# EAGLE board Adding Components (1) (EAGLE 7.6.0)

Size 56.82 x 53.33 mm. Coordinates in mm from the lower left corner, seen from the top.
Outline: 0,0 56.82,0 56.82,53.33 0,53.33 0,0
Copper layers (1*16): Top 0.035mm / dielectric 1.5mm / Bottom 0.035mm
Design rules "default": minimum track width 10mil, minimum drill 24mil, track to track 8mil, track to pad 8mil, pad to pad 8mil, via to via 8mil, smd to smd 8mil, copper to edge 40mil, drill to drill 8mil, minimum pad ring 10mil, minimum via ring 8mil, stop-mask expansion 4mil, vias tented up to drill 0mil, thermal gap 10mil

## Footprints (pad centres in the part's own frame; a part is rotated, then mirrored left to right if it is on the bottom)
DC-POWER = drill 0.889 pad 2.54 octagon: + 0,2.54; - 0,-2.54
C5B2.5 = drill 0.813 pad 1.6 octagon: 1 -2.54,0; 2 2.54,0
LED5MM = drill 0.813 octagon: A -1.27,0; K 1.27,0
0207/10 = drill 0.813 octagon: 1 -5.08,0; 2 5.08,0
DIL08 = drill 0.813 pad 1.27: 1 -3.81,-3.81; 2 -1.27,-3.81; 3 1.27,-3.81; 4 3.81,-3.81; 5 3.81,3.81; 6 1.27,3.81; 7 -1.27,3.81; 8 -3.81,3.81

## Placement (x,y rotation side)
BAT3  [DC-POWER]  5,10.08 0 top
C2  100uF  [C5B2.5]  5,22.78 0 top
D3  [LED5MM]  5,73.58 0 top  (outside the outline)
R3  1k‎Ω  [0207/10]  5,35.48 0 top
R6  500k‎Ω  [0207/10]  5,48.18 0 top
R8  1k‎Ω  [0207/10]  5,86.28 0 top  (outside the outline)
U1  [DIL08]  5,60.88 0 top  (outside the outline)

## Library data of the parts
BAT3 C2 D3 R3 R6 R8 U1 = AUTODESK_CIRCUITS_BREADBOARD

## Nets
N$1: BAT3.+ R3.2 U1.4
N$2: BAT3.- C2.2 D3.K U1.1
N$3: C2.1 U1.2 U1.5
N$4: R3.1 U1.8
N$5: R6.1 U1.7
N$6: R6.2 U1.6
N$7: R8.2 U1.3
N$8: D3.A R8.1

## Tracks (layer width: path | path; a pad name or v marks a point on that pad's centre or on a via)
N$1  (2 unrouted)
N$2  (3 unrouted)
N$3  (2 unrouted)
N$4  (1 unrouted)
N$5  (1 unrouted)
N$6  (1 unrouted)
N$7  (1 unrouted)
N$8  (1 unrouted)